# EAGLE board tqfp44_0.8_usb_big (EAGLE 5.07)
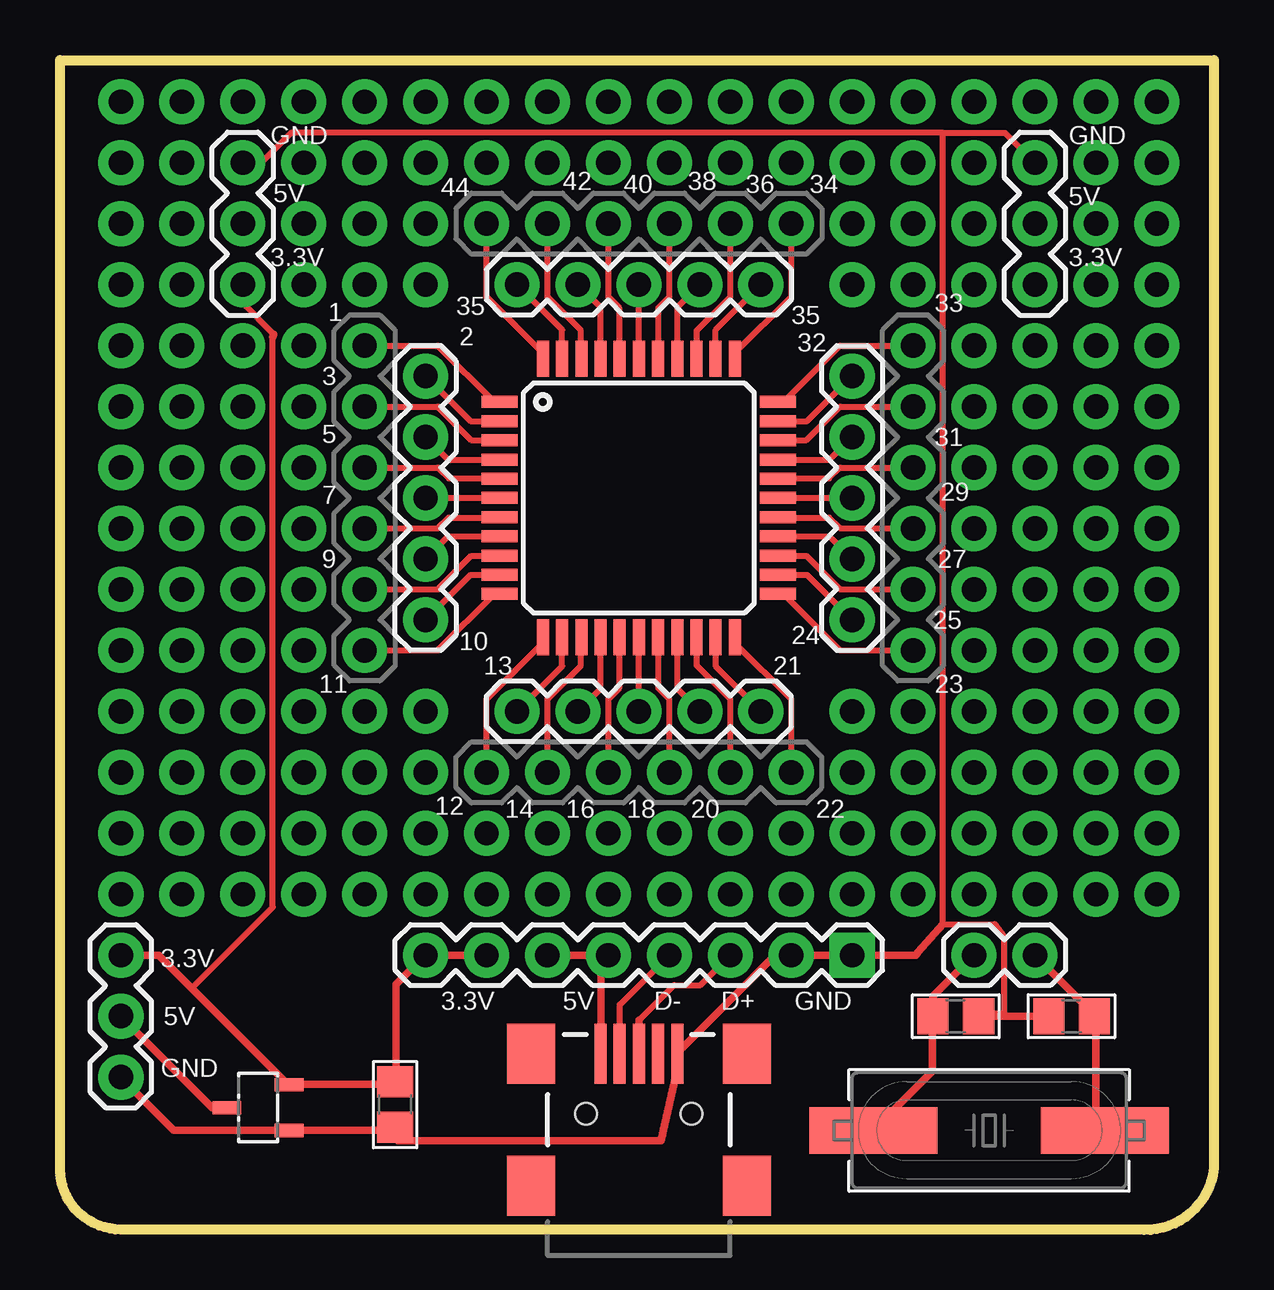
[diagram p0: board, top side]
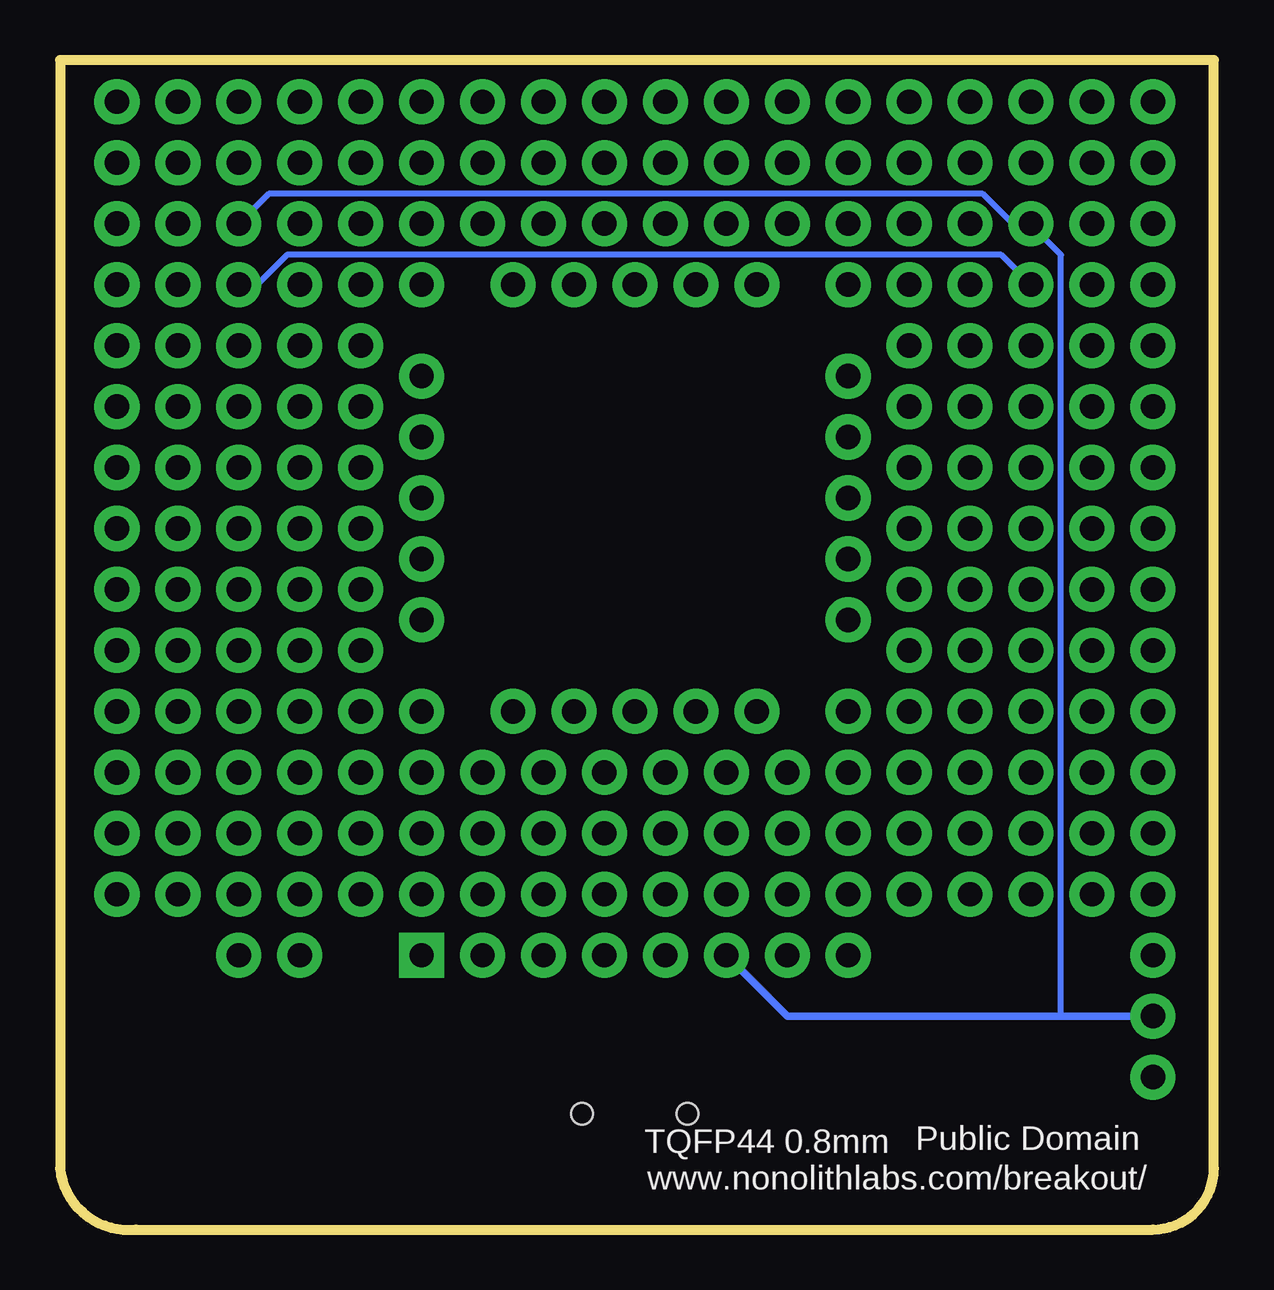
[diagram p1: board, bottom side, seen from below]

Size 48.09 x 48.75 mm. Coordinates in mm from the lower left corner, seen from the top.
Outline: 48.09,48.75 48.09,2.56 arc-90 44.92,0.02 2.54,0.02 arc-90 0,2.56 0,48.75 48.09,48.75
Copper layers (1*16): Top 0.035mm / dielectric 1.5mm / Bottom 0.035mm
Design rules "Fusion_eagle_rule_v1.1 *": minimum track width 6mil, minimum drill 12mil, track to track 7mil, track to pad 7mil, pad to pad 7mil, via to via 7mil, smd to smd 0mil, copper to edge 10mil, drill to drill 10mil, minimum pad ring 10mil, minimum via ring 6mil, stop-mask expansion 2mil, vias tented up to drill 100mil, thermal gap 10mil
Net classes: 0 default: width 0.254 mm, clearance 0.102 mm

## Footprints (pad centres in the part's own frame; a part is rotated, then mirrored left to right if it is on the bottom)
USB-MINIB = smd 2.5 x 0.5: D+ 2.5,0; D- 2.5,0.8; GND 2.5,-1.6; ID 2.5,-0.8; VBUS 2.5,1.6 | smd 2.5 x 2: MTN1 -3,4.5; MTN2 2.5,4.5; MTN3 -3,-4.5; MTN4 2.5,-4.5 | hole 0.9: 0,2.2; 0,-2.2
0805 = smd 1.3 x 1.5: 1 -0.95,0; 2 0.95,0
TQFP44 = smd 1.5 x 0.5: 1 -5.8,4; 2 -5.8,3.2; 3 -5.8,2.4; 4 -5.8,1.6; 5 -5.8,0.8; 6 -5.8,0; 7 -5.8,-0.8; 8 -5.8,-1.6; 9 -5.8,-2.4; 10 -5.8,-3.2; 11 -5.8,-4; 23 5.8,-4; 24 5.8,-3.2; 25 5.8,-2.4; 26 5.8,-1.6; 27 5.8,-0.8; 28 5.8,0; 29 5.8,0.8; 30 5.8,1.6; 31 5.8,2.4; 32 5.8,3.2; 33 5.8,4 | smd 0.5 x 1.5: 12 -4,-5.8; 13 -3.2,-5.8; 14 -2.4,-5.8; 15 -1.6,-5.8; 16 -0.8,-5.8; 17 0,-5.8; 18 0.8,-5.8; 19 1.6,-5.8; 20 2.4,-5.8; 21 3.2,-5.8; 22 4,-5.8; 34 4,5.8; 35 3.2,5.8; 36 2.4,5.8; 37 1.6,5.8; 38 0.8,5.8; 39 0,5.8; 40 -0.8,5.8; 41 -1.6,5.8; 42 -2.4,5.8; 43 -3.2,5.8; 44 -4,5.8
HC49UP = smd 5.334 x 1.93: 1 -4.826,0; 2 4.826,0
1X05 = drill 1.016 pad 1.88 round: 1 0,0; 2 2.54,0; 3 5.08,0; 4 7.62,0; 5 10.16,0
1X06-KIT = drill 1.016 pad 1.88 round: 1 0,0; 2 2.54,0; 3 5.08,0; 4 7.62,0; 5 10.16,0; 6 12.7,0
2X10_NOSILK = drill 1.016 pad 1.88 round: 1 -11.43,-1.27; 2 -11.43,1.27; 3 -8.89,-1.27; 4 -8.89,1.27; 5 -6.35,-1.27; 6 -6.35,1.27; 7 -3.81,-1.27; 8 -3.81,1.27; 9 -1.27,-1.27; 10 -1.27,1.27; 11 1.27,-1.27; 12 1.27,1.27; 13 3.81,-1.27; 14 3.81,1.27; 15 6.35,-1.27; 16 6.35,1.27; 17 8.89,-1.27; 18 8.89,1.27; 19 11.43,-1.27; 20 11.43,1.27
1X03 = drill 1.016 pad 1.88 round: 1 0,0; 2 2.54,0; 3 5.08,0
1X02_NO_SILK = drill 1.016 pad 1.88 round: 1 0,0; 2 2.54,0
1X08 = drill 1.016 pad 1.88 square: 1 0,0 | drill 1.016 pad 1.88 round: 2 2.54,0; 3 5.08,0; 4 7.62,0; 5 10.16,0; 6 12.7,0; 7 15.24,0; 8 17.78,0
SOT23-3 = smd 0.55 x 1.2: 01 0.95,1.3; 02 -0.95,1.3; 03 0,-1.3
1X02 = drill 1.016 pad 1.88 round: 1 0,0; 2 2.54,0
1X03_NO_SILK = drill 1.016 pad 1.88 round: 1 0,0; 2 2.54,0; 3 5.08,0

## Placement (x,y rotation side)
E$1  [USB-MINIB]  24.13,4.84 90 top
E$2  [0805]  13.97,5.22 90 top
E$3  [TQFP44]  24.13,30.5 0 top
E$4  [HC49UP]  38.73,4.15 180 top
E$5  [1X05]  19.05,39.39 0 top
E$6  [1X05]  33.02,25.42 90 top
E$7  [1X05]  29.21,21.61 180 top
E$8  [1X05]  15.24,35.58 270 top
E$9  [1X06-KIT]  12.7,36.85 270 top
E$10  [1X06-KIT]  30.48,19.07 180 top
E$11  [1X06-KIT]  35.56,36.85 270 top
E$12  [2X10_NOSILK]  24.13,45.74 0 top
E$13  [1X06-KIT]  17.78,41.93 0 top
E$14  [1X03]  7.62,39.39 90 top
E$15  [1X02_NO_SILK]  33.02,41.93 0 top
E$16  [1X08]  33.02,11.45 180 top
E$17  [1X02_NO_SILK]  33.02,21.61 0 top
E$18  [1X02_NO_SILK]  33.02,39.39 0 top
E$19  [1X02_NO_SILK]  12.7,41.93 0 top
E$20  [1X02_NO_SILK]  12.7,39.39 0 top
E$23  [1X02_NO_SILK]  12.7,21.61 0 top
E$24  [1X02_NO_SILK]  12.7,19.07 0 top
E$26  [SOT23-3]  8.26,5.1 270 top
E$27  [0805]  42.16,8.91 180 top
E$28  [0805]  37.34,8.91 180 top
E$29  [1X02]  38.1,11.45 0 top
E$30  [1X03]  40.64,39.39 90 top
E$32  [2X10_NOSILK]  8.89,25.42 90 top
E$33  [2X10_NOSILK]  24.13,15.26 0 top
E$34  [2X10_NOSILK]  44.45,33.04 90 top
E$35  [2X10_NOSILK]  3.81,35.58 90 top
E$37  [1X03_NO_SILK]  10.16,39.39 90 top
E$39  [1X02_NO_SILK]  7.62,47.01 0 top
E$40  [2X10_NOSILK]  39.37,25.42 90 top
E$41  [1X03_NO_SILK]  38.1,39.39 90 top
E$42  [1X02_NO_SILK]  38.1,47.01 0 top
E$43  [1X02_NO_SILK]  43.18,47.01 0 top
E$44  [1X02_NO_SILK]  2.54,21.61 0 top
E$45  [1X02_NO_SILK]  2.54,19.07 0 top
E$50  [1X02_NO_SILK]  2.54,16.53 0 top
E$51  [1X02_NO_SILK]  2.54,13.99 0 top
E$52  [1X02_NO_SILK]  43.18,19.07 0 top
E$53  [1X02_NO_SILK]  43.18,16.53 0 top
E$54  [1X02_NO_SILK]  43.18,13.99 0 top
E$55  [1X02_NO_SILK]  33.02,19.07 0 top
E$56  [1X03]  2.54,6.37 90 top

## Library data of the parts
E$1 E$5-E$20 E$23 E$24 E$29 E$30 E$32-E$35 E$37 E$39-E$45 E$50-E$56 = SparkFun
E$2 E$4 E$26-E$28 = nonolith
E$3 = ads4

## Nets
S$1: E$3.44 E$13.1
S$2: E$1.D+ E$16.3
S$3: E$1.D- E$16.4
S$4: E$1.VBUS E$14.2 E$16.5 E$16.6 E$26.03 E$30.2 E$56.2
S$5: E$1.GND E$2.1 E$14.3 E$16.1 E$16.2 E$26.01 E$27.2 E$28.1 E$30.3 E$56.1
S$6: E$4.1 E$27.1 E$29.2
S$7: E$4.2 E$28.2 E$29.1
S$8: E$3.43 E$5.1
S$9: E$3.42 E$13.2
S$10: E$3.41 E$5.2
S$11: E$3.40 E$13.3
S$12: E$3.39 E$5.3
S$13: E$3.38 E$13.4
S$14: E$3.37 E$5.4
S$15: E$3.36 E$13.5
S$16: E$3.35 E$5.5
S$17: E$3.34 E$13.6
S$18: E$3.33 E$11.1
S$19: E$3.32 E$6.5
S$20: E$3.31 E$11.2
S$21: E$3.30 E$6.4
S$22: E$3.29 E$11.3
S$23: E$3.28 E$6.3
S$24: E$3.27 E$11.4
S$25: E$3.26 E$6.2
S$26: E$3.25 E$11.5
S$27: E$3.24 E$6.1
S$28: E$3.23 E$11.6
S$29: E$3.22 E$10.1
S$30: E$3.21 E$7.1
S$31: E$3.20 E$10.2
S$32: E$3.19 E$7.2
S$33: E$3.18 E$10.3
S$34: E$3.17 E$7.3
S$35: E$3.16 E$10.4
S$36: E$3.15 E$7.4
S$37: E$3.14 E$10.5
S$38: E$3.13 E$7.5
S$39: E$3.12 E$10.6
S$40: E$3.11 E$9.6
S$41: E$3.10 E$8.5
S$42: E$3.9 E$9.5
S$43: E$3.8 E$8.4
S$44: E$3.7 E$9.4
S$45: E$3.6 E$8.3
S$46: E$3.5 E$9.3
S$47: E$3.4 E$8.2
S$48: E$3.3 E$9.2
S$49: E$3.2 E$8.1
S$50: E$3.1 E$9.1
S$51: E$2.2 E$14.1 E$16.7 E$16.8 E$26.02 E$30.1 E$56.3

## Tracks (layer width: path | path; a pad name or v marks a point on that pad's centre or on a via)
S$1
  Top 0.254: E$13.1 17.78,38.88 20.12,36.54 20.12,36.31 E$3.44
S$2
  Top 0.254: 24.13,8.73 25.6,10.2 26.7,10.2 E$16.3
  Top 0.305: E$1.D+ 24.13,8.73
S$3
  Top 0.254: 23.34,7.61 23.34,9.39 E$16.4
  Top 0.305: 23.34,7.61 E$1.D-
S$4
  Top 0.305: E$56.2 6.35,5.1 E$26.03 | E$1.VBUS 22.55,7.61 22.55,11.14 E$16.5 E$16.6
  Bottom 0.254: E$14.2 8.38,41.93 9.63,43.17 39.4,43.17 E$30.2 | 7.54,41.8 6.38,40.63 6.38,8.91
  Bottom 0.305: E$56.2 6.38,8.91 17.78,8.91 E$16.6 | 7.54,41.8 E$14.2
S$5
  Top 0.254: E$14.3 8.38,44.47 9.63,45.71 36.8,45.71 | 36.8,45.71 39.4,45.71 E$30.3 | 36.8,45.71 36.8,12.74 38.96,12.74 39.37,12.21 39.37,8.98
  Top 0.305: E$56.1 4.75,4.16 9.4,4.16 E$26.01 9.58,4.16 13.87,4.16 13.97,4.26 E$2.1 14.1,3.73 25.04,3.73 25.65,6.37 25.65,7.46 E$1.GND 25.73,7.61 25.96,7.61 29.79,11.45 E$16.2 E$16.1 35.69,11.45 35.76,11.57 36.8,12.74 | E$27.2 E$28.1 38.15,8.98 39.37,8.98
S$6
  Top 0.305: E$29.2 43.1,8.98 E$27.1 43.18,8.78 43.18,4.51 43.54,4.16 E$4.1
S$7
  Top 0.305: E$4.2 36.37,6.62 36.37,8.91 E$28.2 36.39,9.74 E$29.1
S$8
  Top 0.254: E$5.1 20.93,37.51 20.93,36.31 E$3.43
S$9
  Top 0.254: E$13.2 20.32,38.88 21.72,37.48 21.72,36.31 E$3.42
S$10
  Top 0.254: E$5.2 22.53,38.45 22.53,36.31 E$3.41
S$11
  Top 0.254: E$13.3 22.86,38.88 23.32,38.42 23.32,36.31 E$3.40
S$12
  Top 0.254: E$3.39 E$5.3
S$13
  Top 0.254: E$13.4 25.4,38.88 24.94,38.42 24.94,36.31 E$3.38
S$14
  Top 0.254: E$5.4 25.73,38.45 25.73,36.31 E$3.37
S$15
  Top 0.254: E$13.5 27.94,38.88 26.54,37.48 26.54,36.31 E$3.36
S$16
  Top 0.254: E$5.5 27.33,37.51 27.33,36.31 E$3.35
S$17
  Top 0.254: E$13.6 30.48,38.88 28.14,36.54 28.14,36.31 E$3.34
S$18
  Top 0.254: E$11.1 32.51,36.85 30.18,34.51 29.95,34.51 E$3.33
S$19
  Top 0.254: E$6.5 31.14,33.7 29.95,33.7 E$3.32
S$20
  Top 0.254: E$11.2 32.51,34.31 31.11,32.91 29.95,32.91 E$3.31
S$21
  Top 0.254: E$6.4 32.08,32.1 29.95,32.1 E$3.30
S$22
  Top 0.254: E$11.3 32.51,31.77 32.05,31.31 29.95,31.31 E$3.29
S$23
  Top 0.254: E$3.28 E$6.3
S$24
  Top 0.254: E$11.4 32.51,29.23 32.05,29.68 29.95,29.68 E$3.27
S$25
  Top 0.254: E$6.2 32.08,28.9 29.95,28.9 E$3.26
S$26
  Top 0.254: E$11.5 32.51,26.69 31.11,28.08 29.95,28.08 E$3.25
S$27
  Top 0.254: E$6.1 31.14,27.3 29.95,27.3 E$3.24
S$28
  Top 0.254: E$11.6 32.51,24.15 30.18,26.48 29.95,26.48 E$3.23
S$29
  Top 0.254: E$10.1 30.48,22.12 28.14,24.45 28.14,24.68 E$3.22
S$30
  Top 0.254: E$7.1 27.33,23.49 27.33,24.68 E$3.21
S$31
  Top 0.254: E$10.2 27.94,22.12 26.54,23.51 26.54,24.68 E$3.20
S$32
  Top 0.254: E$7.2 25.73,22.55 25.73,24.68 E$3.19
S$33
  Top 0.254: E$10.3 25.4,22.12 24.94,22.57 24.94,24.68 E$3.18
S$34
  Top 0.254: E$7.3 E$3.17
S$35
  Top 0.254: E$10.4 22.86,22.12 23.32,22.57 23.32,24.68 E$3.16
S$36
  Top 0.254: E$7.4 22.53,22.55 22.53,24.68 E$3.15
S$37
  Top 0.254: E$10.5 20.32,22.12 21.72,23.51 21.72,24.68 E$3.14
S$38
  Top 0.254: E$7.5 20.93,23.49 20.93,24.68 E$3.13
S$39
  Top 0.254: E$10.6 17.78,22.12 20.12,24.45 20.12,24.68 E$3.12
S$40
  Top 0.254: E$9.6 15.75,24.15 18.09,26.48 18.31,26.48 E$3.11
S$41
  Top 0.254: E$8.5 17.12,27.3 18.31,27.3 E$3.10
S$42
  Top 0.254: E$9.5 15.75,26.69 17.14,28.08 18.31,28.08 E$3.9
S$43
  Top 0.254: E$8.4 16.18,28.9 18.31,28.9 E$3.8
S$44
  Top 0.254: E$9.4 15.75,29.23 16.2,29.68 18.31,29.68 E$3.7
S$45
  Top 0.254: E$8.3 E$3.6
S$46
  Top 0.254: E$9.3 15.75,31.77 16.2,31.31 18.31,31.31 E$3.5
S$47
  Top 0.254: E$8.2 16.18,32.1 18.31,32.1 E$3.4
S$48
  Top 0.254: E$9.2 15.75,34.31 17.14,32.91 18.31,32.91 E$3.3
S$49
  Top 0.254: E$8.1 17.12,33.7 18.31,33.7 E$3.2
S$50
  Top 0.254: E$9.1 15.75,36.85 18.09,34.51 18.31,34.51 E$3.1
S$51
  Top 0.254: 8.91,37.33 7.62,38.63 | 8.87,37.2 8.87,13.45 5.49,10.08
  Top 0.305: 7.62,38.63 E$14.1 | E$56.3 4.12,11.45 5.49,10.08 9.42,6.14 E$26.02 9.58,6.06 13.87,6.06 13.97,6.16 E$2.2 14.02,6.32 14.02,10.23 E$16.8 E$16.7 | 8.87,37.2 8.91,37.33
  Bottom 0.254: 39.88,39.39 38.63,40.63 8.87,40.63 E$14.1
  Bottom 0.305: 39.88,39.39 E$30.1

## Text on the board
tNames: GND | GND | 5V | 44 | 42 | 40 | 38 | 36 | 34 | 5V | 3.3V | 3.3V | 1 | 35 | 35 | 33 | 2 | 32 | 3 | 5 | 31 | 7 | 29 | 9 | 27 | 25 | 10 | 24 | 13 | 21 | 11 | 23 | 12 | 14 | 16 | 18 | 20 | 22 | 3.3V | 5V | 3.3V | 5V | D- | D+ | GND | GND
bNames: Public Domain | TQFP44 0.8mm | www.nonolithlabs.com/breakout/